# Altium PCB WB-AV-4509-IMUBR.PcbDoc
Units mil, origin at the board's own origin, x right, y up, seen from the top; angles counter-clockwise.
Board outline 1590 x 1305 mil, 2 copper layers (Top Layer, Bottom Layer); 2 components, 15 nets, 36 pads, 0 vias.
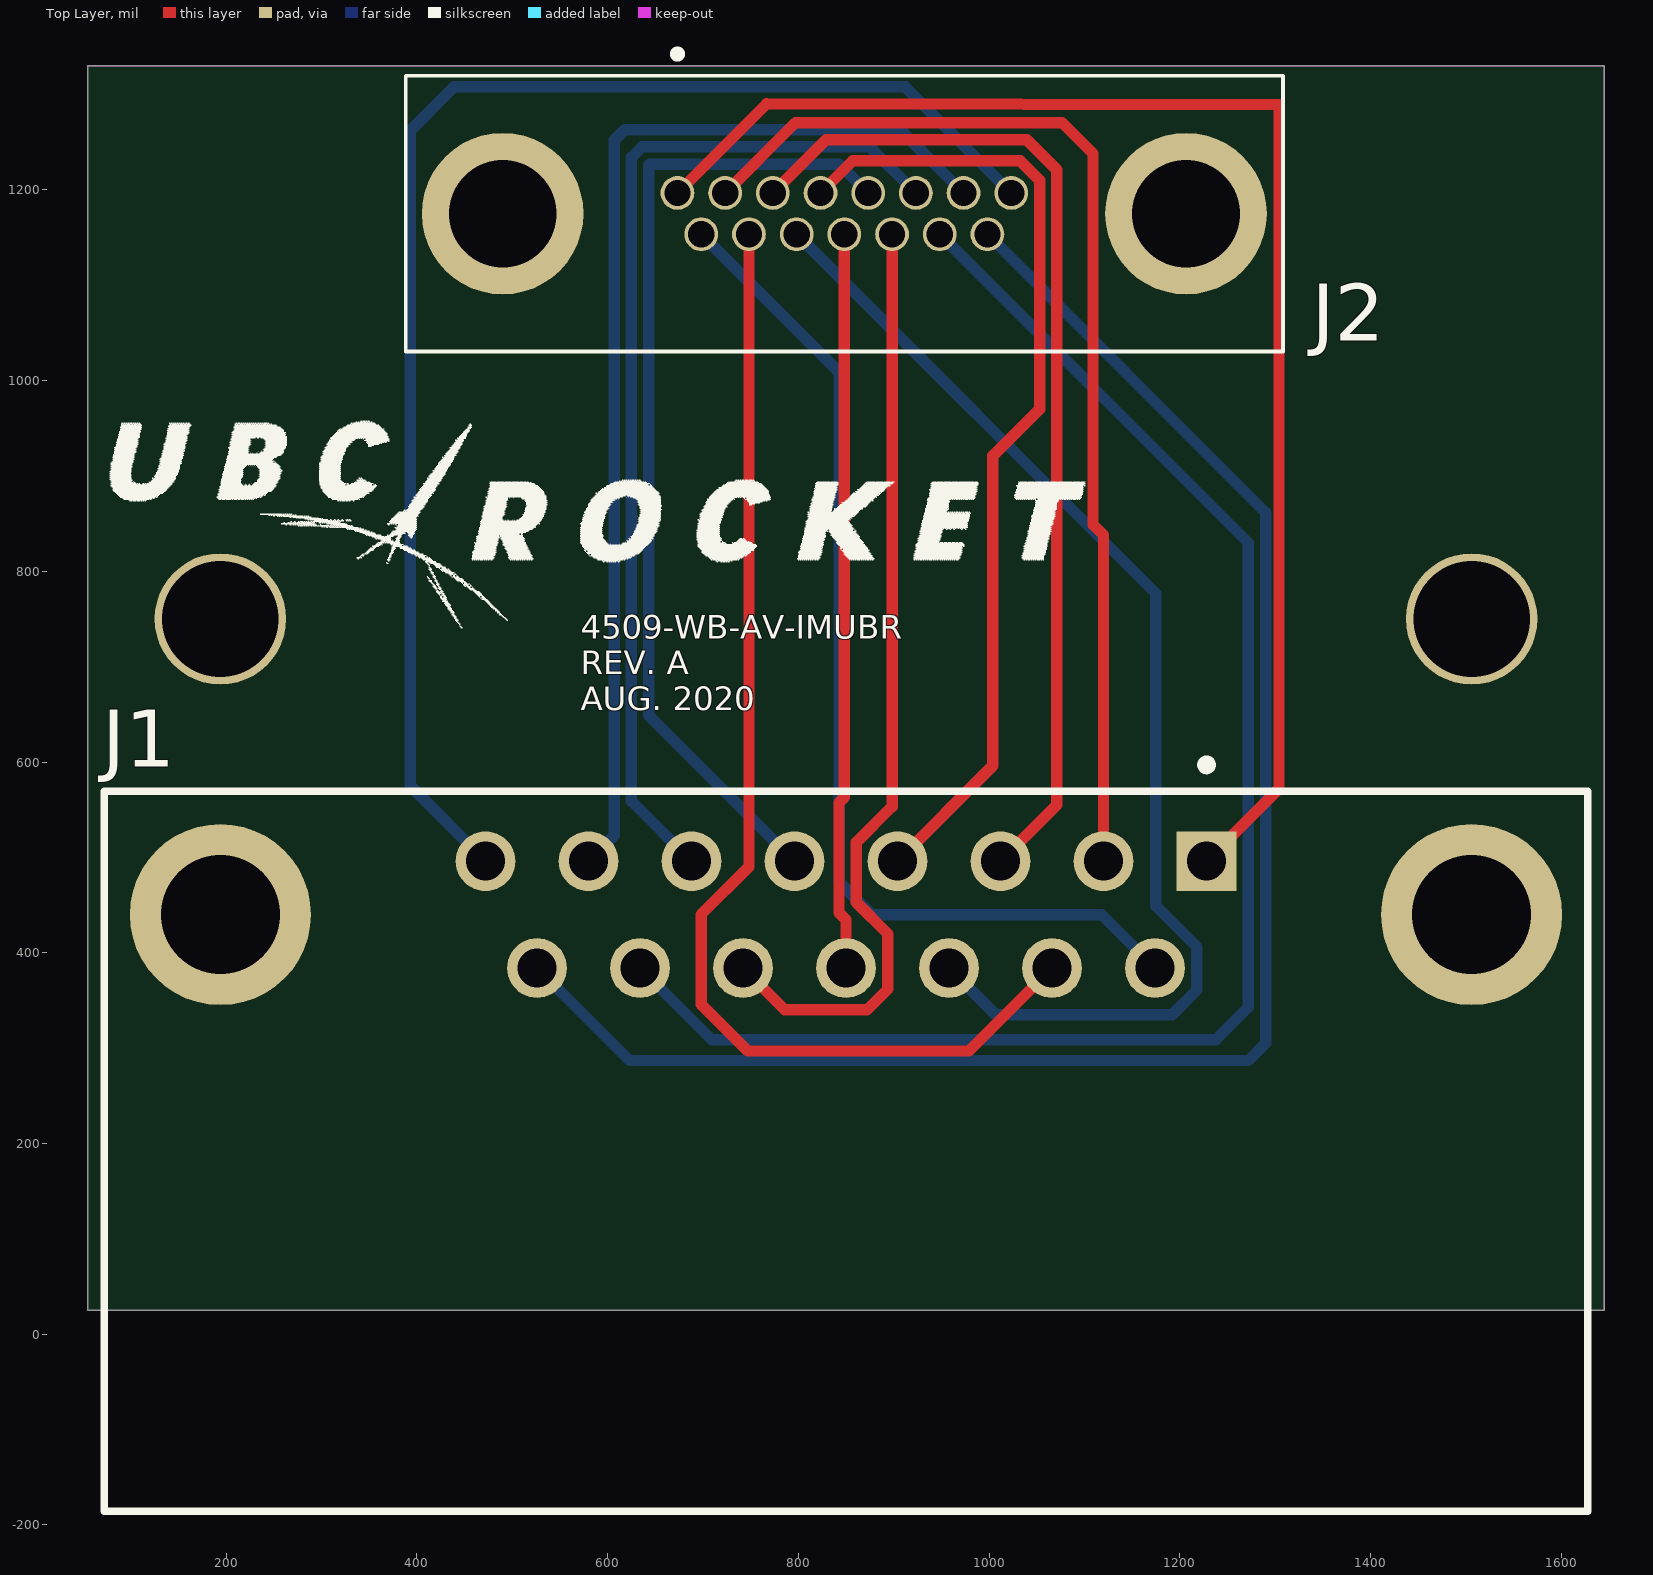
[diagram p0: Top Layer view]
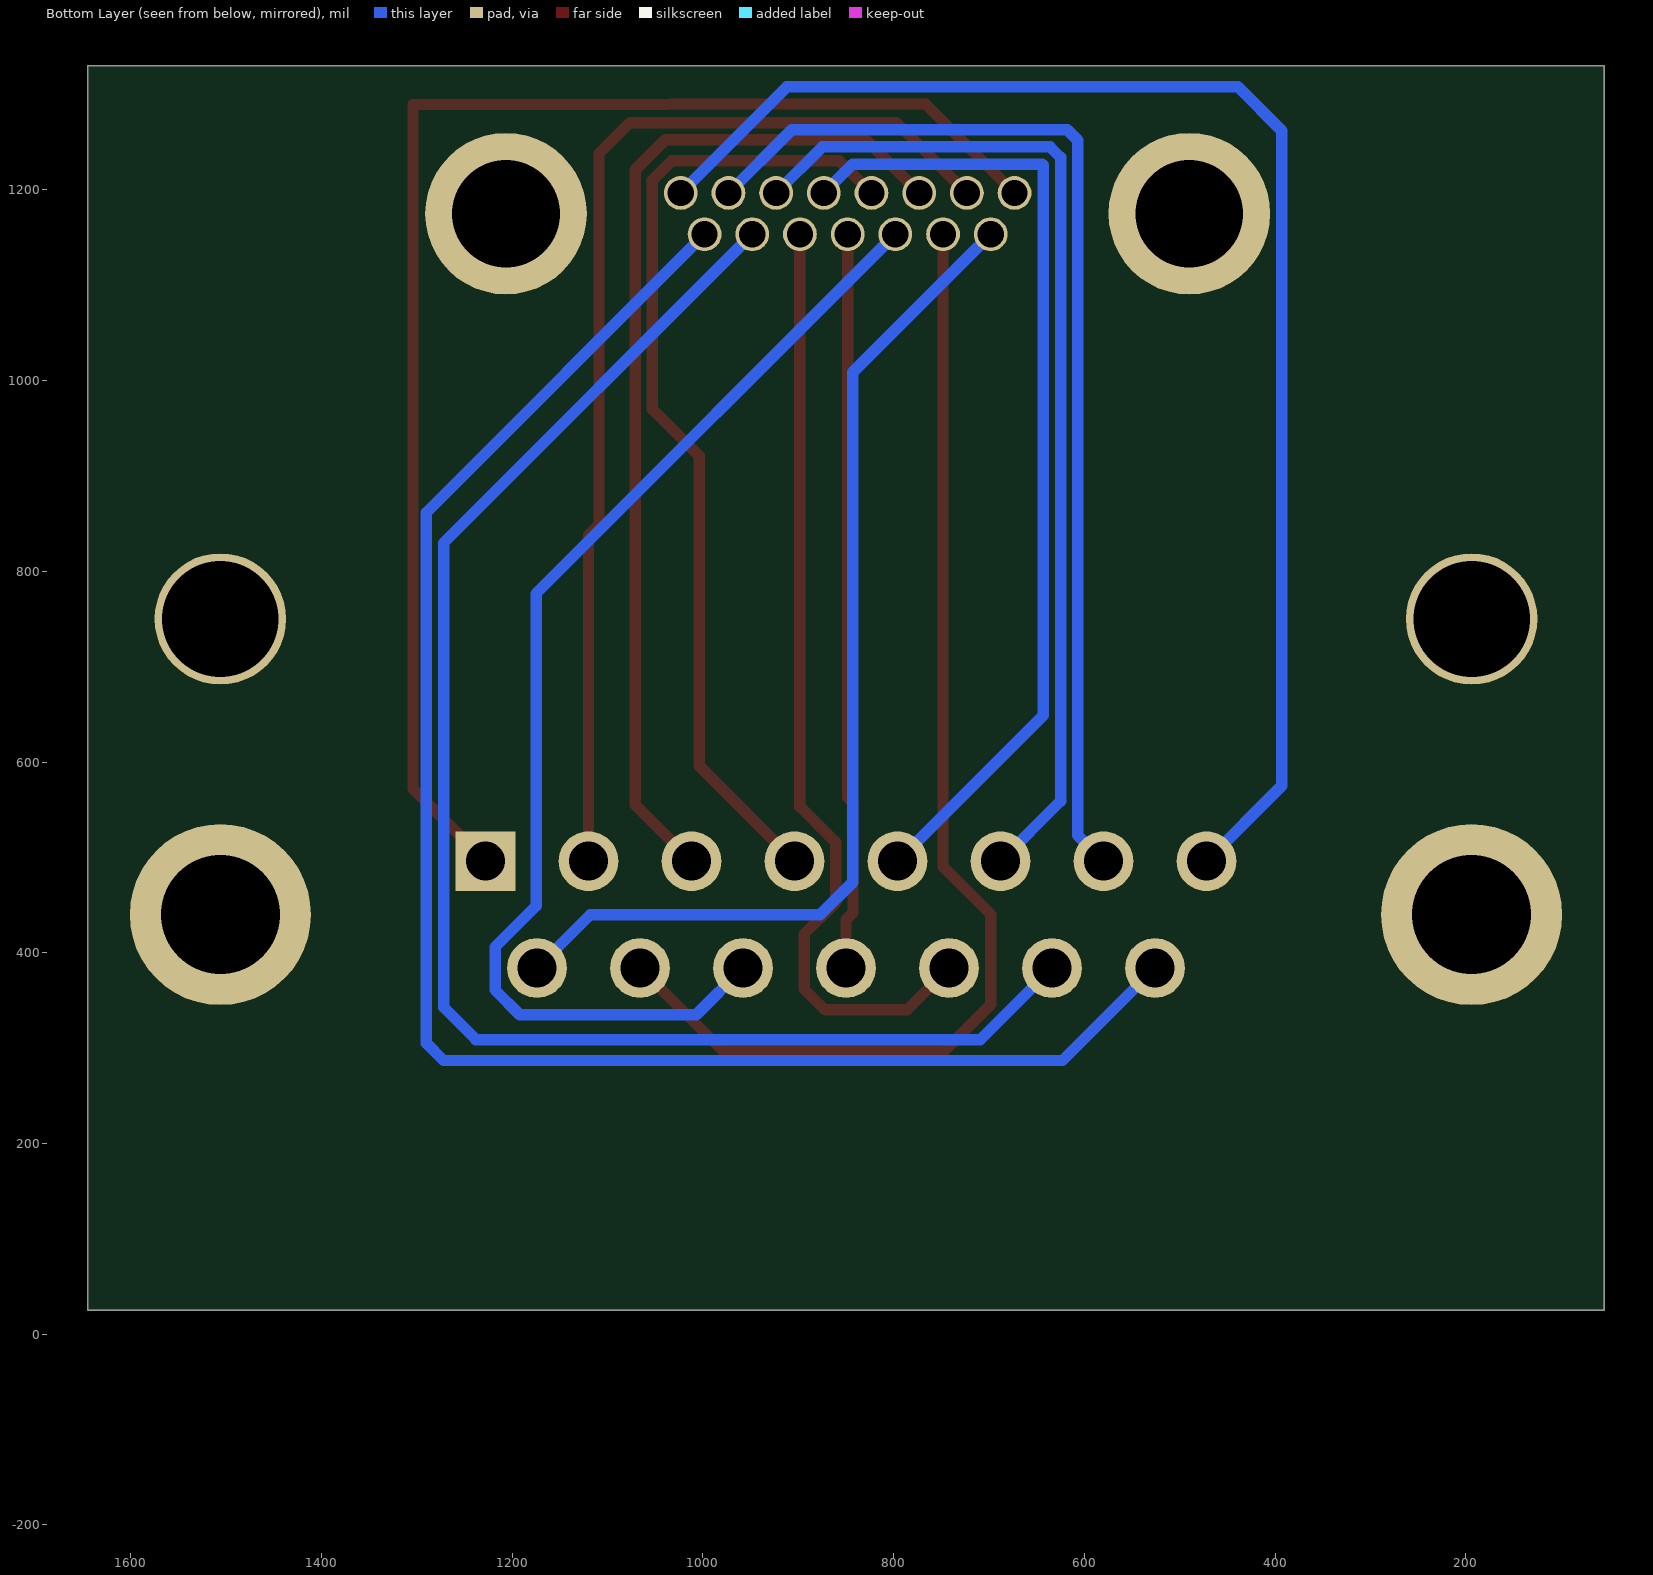
[diagram p1: Bottom Layer view, seen from below]

## Layer stack, top to bottom
Top Solder: solder mask 0.4, Solder Resist, Dk 3.5
Top Layer: signal copper 1.4
Dielectric 1: dielectric 12.6, FR-4, Dk 4.8
Bottom Layer: signal copper 1.4
Bottom Solder: solder mask 0.4, Solder Resist, Dk 3.5

## Board outline
55,25 1645,25 1645,1330 55,1330

## Design rules (kind name [scope] priority, off if disabled: settings)
Clearance [All] p1: gap=6 ignorepadtopadclearanceinfootprint=FALSE except(0: Arc-Hole Track-Hole SMDPad-Hole THPad-Hole Via-Hole Fill-Hole Poly-Hole Region-Hole Text-Hole)
ComponentClearance [All] p1: gap=0 collisioncheckmode=3 verticalgap=0.1 showdistances=FALSE
HoleSize [All] p1: absolutevalues=TRUE maxlimit=1000 minlimit=1 maxpercent=80.000 minpercent=20.000
MinimumSolderMaskSliver [All] p1: minsoldermaskwidth=1
PolygonConnect [All] p1: connectstyle=Direct reliefconductorwidth=10 reliefentries=4 polygonreliefangle="90 Angle" airgapwidth=10
RoomDefinition 380-015-113L001 [InComponentClass('380-015-113L001')] p1: confinementstyle=ConfineIn formatcopy=TRUE lockcomponents=FALSE outline -35,-245 1760,-245 1760,1440 -35,1440
RoutingVias [All] p1: holewidth=7.87 width=19.87 viastyle="Through Hole" minholewidth=7.87 minwidth=19.87 maxholewidth=28 maxwidth=50
SilkToSilkClearance [All] p1: silktosilkclearance=1
SilkToSolderMaskClearance [IsPad] p1: minsilkscreentomaskgap=1 clearancetoexposedcopper=TRUE
SolderMaskExpansion [All] p1: expansion=4 istentingtop=FALSE
Width [All] p1: maxlimit=200 minlimit=10 preferedwidth=12
25 further rules are at their usual default settings.

## Components (designator, comment, footprint, x,y, rotation, side; value= is the part's Value field where it differs from the comment)
J1 "5747845-5" FP-5747845-5-MFG 850,192 r180 top
J2 "380-015-113L001" 380015113L001 673.27,1196.65 r0 top

## Footprints (in the part's own frame and the unit in brackets; to place one, negate y for a bottom-side part, rotate by r counter-clockwise, add the part's x,y. Pads: shape width x height; smd on the part's side, far side on the other; paste and mask are expansions set on the pad)
380015113L001 [mm]
  round 0.9 hole 0.7: 1(0,0) 2(1.27,0) 3(2.54,0) 4(3.81,0) 5(5.08,0) 6(6.35,0) 7(7.62,0) 8(8.89,0) 9(0.635,-1.1) 10(1.905,-1.1) 11(3.175,-1.1) 12(4.445,-1.1) 13(5.715,-1.1) 14(6.985,-1.1) 15(8.255,-1.1)
  round 4.305 hole 2.87: MH1(-4.655,-0.55) MH2(13.545,-0.55)
  silkscreen extent -7.23,-4.22 16.12,3.8, body extent -7.23,-4.23 16.12,3.13, height 10.3
FP-5747845-5-MFG [mil]
  rect 62.65x62.65 hole 41 paste-39370.1 mask+0: 1(-378,-304)
  round 62.65 hole 41 paste-39370.1 mask+0: 2(-270,-304) 3(-162,-304) 4(-54,-304) 5(54,-304) 6(162,-304) 7(270,-304) 8(378,-304) 9(-324,-192) 10(-216,-192) 11(-108,-192) 12(0,-192) 13(108,-192) 14(216,-192) 15(324,-192)
  round 189.96 hole 125 paste-39370.1 mask+0: 16(-656,-248) 17(656,-248)
  silkscreen extent -778,-410 778,378, body extent -782,-381 782,381, height 10

## Part data
J1: library part CMP-03367-000001-1, "CONN D-SUB RCPT 15POS R/A SOLDER", Current Rating=6A, Manufacturer="TE Connectivity", Temperature="-55°C to +105°C", Temperature Range High=+105°C, Temperature Range Low=-55°C, Automotive=No, Category=Conn, ComponentLink2Description=Datasheet, ComponentLink2URL=https://www.te.com/commerce/DocumentDelivery/DDEController?Action=showdoc&DocId=Catalog+Section%7F82068_AMPLIMITE_Right-Angle_Posted_Conn%7F0412%7Fpdf%7FEnglish%7FENG_CS_82068_AMPLIMITE_Right-Angle_Posted_Conn_0412.pdf%7F5747845-5, Conn Gender=Female, Conn Orientation="Right Angle", Contact Material=Gold,Nickel, Device Class L1=Connectors, Device Class L2="D-Sub Connectors", Device Class L3=unset, Digikey Description="CONN D-SUB RCPT 15POS R/A SOLDER", Footprint Url=https://www.te.com/commerce/DocumentDelivery/DDEController?Action=showdoc&DocId=Customer+Drawing%7F5747845%7FA2%7Fpdf%7FEnglish%7FENG_CD_5747845_A2.pdf%7F5747845-5, Height=0.509inch, Is Female=yes, Lead Free=Yes, Manufacturer Part Number=5747845-5, Mouser Description="D-Sub Standard Connectors RECP FRNT MTL SHL 15", Number Of Contacts=15, Octopart=https://octopart.com/5747845-5-te+connectivity-39499908, Package=5747845-5, Pitch=2.74mm, RoHS=TRUE, Shielding=true
J2: "Connector", Manufacturer_Name=NorComp, Height=10.2mm, Manufacturer_Part_Number=380-015-113L001

## Free pads (board coordinates)
  round 137.8 hole 122.05: 1(194,750) 1(1506,750)

## Nets (pads, with @x,y where several pads share a name; then routed paths per layer and width w, separated by ;. In a path a pad name is that pad's centre, name@x,y a point inside that pad or via, vN(x,y) a via of type N, cw(c..) or ccw(c..) an arc to the next point about the centre after c; other vN are vias at no path point)
NetJ1_1: J1.1 J2.1 | length 1493.9
  Top Layer w12: J2.1 766.61,1290 1304,1289 1304,572 J1.1
NetJ1_2: J1.2 J2.2 | length 1176.3
  Top Layer w12: J2.2 797.11,1270.5 1076.5,1270.5 1109,1238 1109,849 1120,838 J1.2
NetJ1_3: J1.3 J2.3 | length 1083.4
  Top Layer w12: J2.3 829.11,1252.5 1039.5,1252.5 1071,1221 1071,555 J1.3
NetJ1_4: J1.4 J2.4 | length 1027.8
  Top Layer w12: J2.4 856.9,1230.28 1032.72,1230.28 1053,1210 1053,970 1004,921 1004,596 J1.4
NetJ1_5: J1.5 J2.5 | length 1036.6
  Bottom Layer w12: J1.5 643,649 643,1226 644,1227 842.92,1227 J2.5
NetJ1_6: J1.6 J2.6 | length 1086.9
  Bottom Layer w12: J1.6 625,559 625,1234 636,1245 874.92,1245 J2.6
NetJ1_7: J1.7 J2.7 | length 1165.5
  Bottom Layer w12: J1.7 607,523 607,1252 618,1263 906.92,1263 J2.7
NetJ1_8: J1.8 J2.8 | length 1494.2
  Bottom Layer w12: J1.8 393,575 393,1262 439,1308 911.92,1308 J2.8
NetJ1_9: J1.9 J2.9 | length 1107.6
  Bottom Layer w12: J2.9 843,1008.61 843,474 877,440 1118,440 J1.9
NetJ1_10: J1.10 J2.10 | length 1252.5
  Top Layer w12: J2.10 748.27,490.27 698,440 698,346 747,297 979,297 J1.10
NetJ1_11: J1.11 J2.11 | length 1257.3
  Bottom Layer w12: J2.11 1175,776.61 1175,449 1218,406 1218,361 1192,335 1007,335 J1.11
NetJ1_12: J1.12 J2.12 | length 774.7
  Top Layer w12: J2.12 848.27,562.92 842.67,557.33 842.67,442 850,434.67 J1.12
NetJ1_13: J1.13 J2.13 | length 1000.1
  Top Layer w12: J1.13 786,340 872,340 894,362 894,419.67 860.67,453 860.67,515.67 898.27,553.27 J2.13
NetJ1_14: J1.14 J2.14 | length 1627.6
  Bottom Layer w12: J1.14 709,309 1238,309 1272,343 1272,829.61 J2.14
NetJ1_15: J1.15 J2.15 | length 1780.8
  Bottom Layer w12: J1.15 623,287 1272,287 1290,305 1290,861.61 J2.15
pads on no net: J1.16 J1.17 J2.MH1 J2.MH2

## Keep-outs
Keep-Out Layer:
  the board outline again, w1

## Silkscreen, mask and mechanical layers (free items; w line width, h text height)
Top Overlay:
  drawing of 27 lines, arcs and shapes, not listed
  text "4509-WB-AV-IMUBR / REV. A / AUG. 2020" at 571.61,654.5 h25